# EAGLE board Swissler_HW2 (EAGLE 8.1.0)
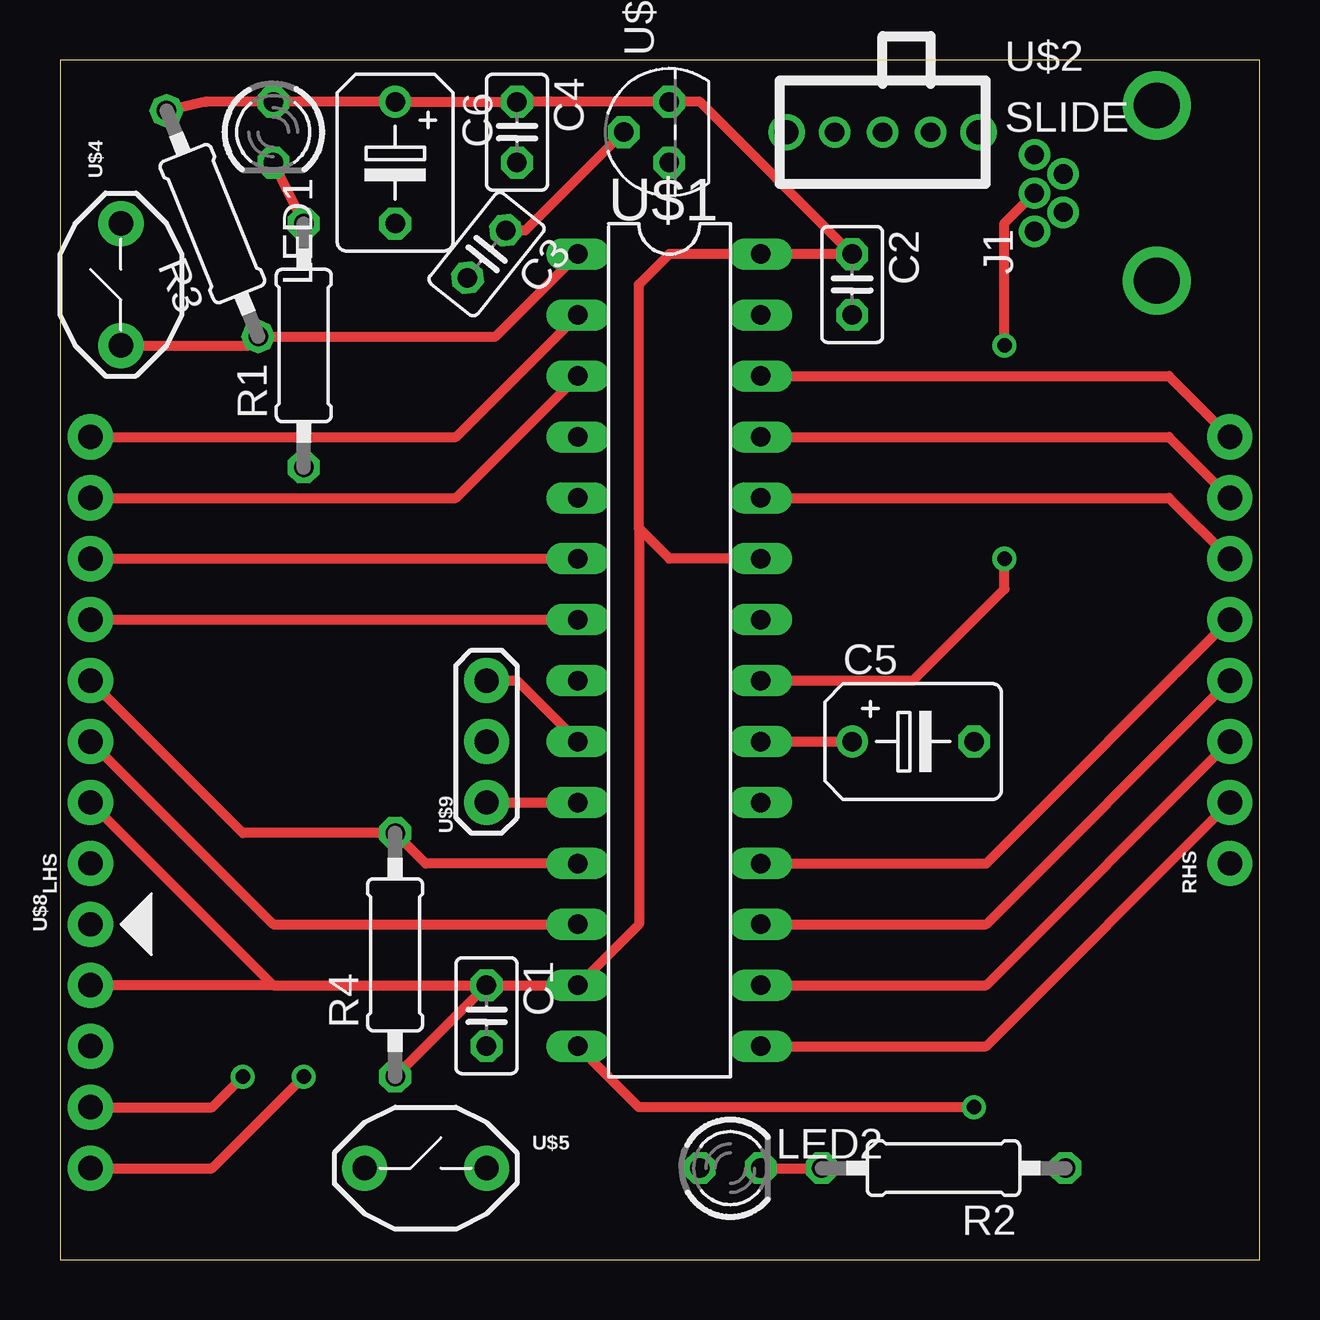
[diagram p0: board, top side]
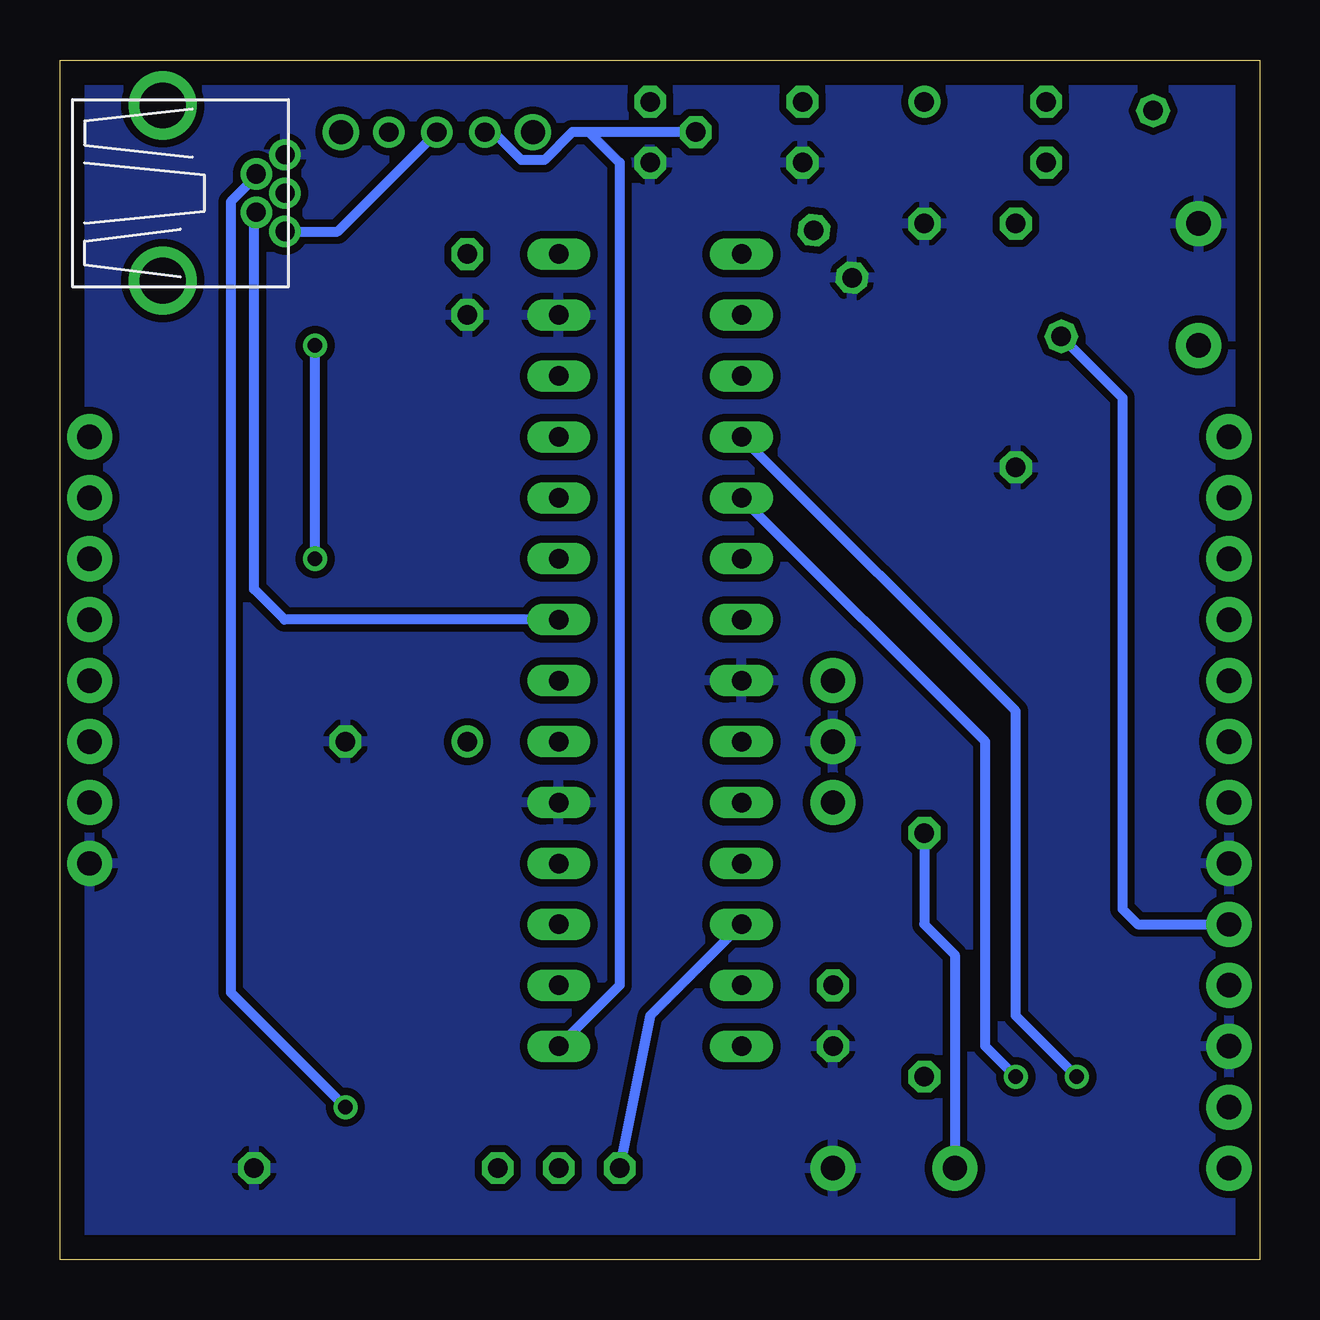
[diagram p1: board, bottom side, seen from below]

Size 50 x 50 mm. Coordinates in mm from the lower left corner, seen from the top.
Outline: 0,0 50,0 50,50 0,50 0,0
Copper layers (1*16): Top 0.035mm / dielectric 1.5mm / Bottom 0.035mm
Design rules "default": minimum track width 10mil, minimum drill 24mil, track to track 8mil, track to pad 8mil, pad to pad 8mil, via to via 8mil, smd to smd 8mil, copper to edge 40mil, drill to drill 8mil, minimum pad ring 10mil, minimum via ring 8mil, stop-mask expansion 4mil, vias tented up to drill 0mil, thermal gap 10mil

## Footprints (pad centres in the part's own frame; a part is rotated, then mirrored left to right if it is on the bottom)
C025-025X050 = drill 0.813 octagon: 1 -1.27,0; 2 1.27,0
B45181B = drill 0.813: + -2.54,0 | drill 0.813 octagon: - 2.54,0
USB-MB-H = drill 0.8: D+ 5.1,0; D- 3.9,0.8; GND 5.1,-1.6; ID 3.9,-0.8; VBUS 5.1,1.6 | drill 1.9: P$6 0,-3.65; P$7 0,3.65
LED3MM = drill 0.813 octagon: A -1.27,0; K 1.27,0
1X08 = drill 1.016 pad 1.88: 1 0,0; 2 2.54,0; 3 5.08,0; 4 7.62,0; 5 10.16,0; 6 12.7,0; 7 15.24,0; 8 17.78,0
0207/10 = drill 0.813 octagon: 1 -5.08,0; 2 5.08,0
DIL28-3 = drill 0.813 long: 1 -16.51,-3.81; 2 -13.97,-3.81; 3 -11.43,-3.81; 4 -8.89,-3.81; 5 -6.35,-3.81; 6 -3.81,-3.81; 7 -1.27,-3.81; 8 1.27,-3.81; 9 3.81,-3.81; 10 6.35,-3.81; 11 8.89,-3.81; 12 11.43,-3.81; 13 13.97,-3.81; 14 16.51,-3.81; 15 16.51,3.81; 16 13.97,3.81; 17 11.43,3.81; 18 8.89,3.81; 19 6.35,3.81; 20 3.81,3.81; 21 1.27,3.81; 22 -1.27,3.81; 23 -3.81,3.81; 24 -6.35,3.81; 25 -8.89,3.81; 26 -11.43,3.81; 27 -13.97,3.81; 28 -16.51,3.81
SLIDE = drill 0.8: 1 -2,0; 2 0,0; 3 2,0 | drill 1: P$1 -4,0; P$2 4,0
TO92 = drill 0.813 octagon: 1 -1.27,0; 2 0,1.905; 3 1.27,0
PB = drill 1.016 pad 1.88: 1 -2.54,0; 2 2.54,0
1X05 = drill 1.016 pad 1.88: 1 0,0; 2 2.54,0; 3 5.08,0; 4 7.62,0; 5 10.16,0
OSC = drill 1.016 pad 1.88: 1 -2.54,0; 2 0,0; 3 2.54,0

## Placement (x,y rotation side)
C1  0.1uF  [C025-025X050]  17.78,10.16 270 top
C2  0.1uF  [C025-025X050]  33.02,40.64 270 top
C3  0.1uF  [C025-025X050]  17.78,41.91 231.3 top
C4  0.1uF  [C025-025X050]  19.05,46.99 270 top
C5  10uF  [B45181B]  35.56,21.59 0 top
C6  10uF  [B45181B]  13.97,45.72 270 top
J1  USB-MB-H  [USB-MB-H]  45.72,44.45 180 top
LED1  RED  [LED3MM]  8.89,46.99 270 top
LED2  GREEN  [LED3MM]  27.94,3.81 0 top
LHS  CONN_08  [1X08]  1.27,16.51 90 top
R1  330  [0207/10]  10.16,38.1 90 top
R2  330  [0207/10]  36.83,3.81 180 top
R3  10k  [0207/10]  6.35,43.18 112.1 top
R4  10k  [0207/10]  13.97,12.7 90 top
RHS  CONN_08  [1X08]  48.77,16.51 90 top
U$1  PIC32MX250F128B  [DIL28-3]  25.4,25.4 270 top
U$2  SLIDE  [SLIDE]  34.29,46.99 0 top
U$3  MMCP1702  [TO92]  25.4,46.99 90 top
U$4  RESET  [PB]  2.54,40.64 90 top
U$5  USER  [PB]  15.24,3.81 0 top
U$8  PICKIT3  [1X05]  1.27,13.97 270 top
U$9  OSC  [OSC]  17.78,21.59 90 top

## Library data of the parts
C1-C6 J1 LHS R1-R4 RHS U$1-U$5 U$8 U$9 = Swissler_HW2
LED1 LED2 = led

## Nets
+3V3: C1.1 C2.1 C4.1 C6.+ LED1.A LHS.2 R3.2 R4.1 U$1.13 U$1.23 U$1.28 U$3.3 U$8.2
+5V: C3.1 RHS.2 U$1.15 U$2.1 U$3.2
A0: LHS.8 U$1.2
A1: LHS.7 U$1.3
A4/LED: LED2.A LHS.3 U$1.12
B2: LHS.6 U$1.6
B3: LHS.5 U$1.7
B4/USER: LHS.4 R4.2 U$1.11 U$5.1
B7: RHS.3 U$1.16
B8: RHS.4 U$1.17
B9: RHS.5 U$1.18
B13: RHS.6 U$1.24
B14: RHS.7 U$1.25
B15: RHS.8 U$1.26
D+: J1.D+ U$1.21
D-: J1.D- U$1.22
GND: C1.2 C2.2 C3.2 C4.2 C5.- C6.- J1.GND LHS.1 R1.1 R2.1 RHS.1 U$1.8 U$1.19 U$1.27 U$3.1 U$4.2 U$5.2 U$8.3 U$9.2
MCLR: R3.1 U$1.1 U$4.1 U$8.1
N$2: U$1.9 U$9.3
N$3: U$1.10 U$9.1
N$4: LED2.K R2.2
N$5: LED1.K R1.2
PGC: U$1.5 U$8.5
PGD: U$1.4 U$8.4
USBID: J1.ID U$1.14
VBUS: J1.VBUS U$2.2
VCAP: C5.+ U$1.20

## Tracks (layer width: path | path; a pad name or v marks a point on that pad's centre or on a via)
+3V3
  Top 0.406: R3.2 6.08,48.26 LED1.A C6.+ C4.1 U$3.3 26.67,48.26 C2.1 U$1.28 25.4,41.91 24.13,40.64 24.13,30.48 | C1.1 U$1.13 24.13,13.97 24.13,30.48 | R4.1 C1.1 | 8.89,11.43 U$8.2 | LHS.2 8.89,11.43 | U$1.23 25.4,29.21 24.13,30.48 | 8.89,11.43 C1.1
+5V
  Top 0.406: U$1.15 38.61,8.89 RHS.2 | C3.1 19.41,42.9 U$3.2
  Bottom 0.406: U$1.15 26.67,11.43 26.67,45.72 27.94,46.99 | U$3.2 27.94,46.99 | 27.94,46.99 28.65,46.99 29.81,45.83 30.77,45.83 31.93,46.99 U$2.1
A0
  Top 0.406: LHS.8 16.51,34.29 U$1.2
A1
  Top 0.406: LHS.7 16.51,31.75 U$1.3
A4/LED
  Top 0.406: LHS.3 8.89,13.97 U$1.12 21.59,13.6
  Bottom 0.406: U$1.12 25.4,10.16 LED2.A
B2
  Top 0.406: LHS.6 U$1.6
B3
  Top 0.406: LHS.5 U$1.7
B4/USER
  Top 0.406: U$1.11 15.24,16.51 R4.2 7.62,17.78 LHS.4
  Bottom 0.406: R4.2 13.97,13.97 12.7,12.7 U$5.1
B7
  Top 0.406: U$1.16 38.61,11.43 RHS.3
B8
  Top 0.406: U$1.17 38.61,13.97 RHS.4
B9
  Top 0.406: U$1.18 38.61,16.51 RHS.5
B13
  Top 0.406: U$1.24 46.23,31.75 RHS.6
B14
  Top 0.406: U$1.25 46.23,34.29 RHS.7
B15
  Top 0.406: U$1.26 46.23,36.83 RHS.8
D+  (via drill 0.6)
  Top 0.406: U$1.21 35.56,24.13 39.37,27.94 v39.37,29.21 | v39.37,38.1 39.37,43.2 J1.D+
  Bottom 0.406: v39.37,29.21 v39.37,38.1
D-
  Bottom 0.406: U$1.22 40.64,26.67 41.91,27.94 41.91,43.56 J1.D-
GND
  pour Bottom (isolate 0.305): 0,50.8 -2.54,50.8 -2.54,-2.54 50.8,-2.54 50.8,50.8
MCLR
  Top 0.406: U$4.1 7.89,38.1 R3.1 18.15,38.47 U$1.1
  Bottom 0.406: R3.1 5.71,35.93 5.71,14.61 5.08,13.97 U$8.1
N$2
  Top 0.406: U$9.3 19.05,24.13 U$1.9
N$3
  Top 0.406: U$9.1 U$1.10
N$4
  Top 0.406: LED2.K R2.2
N$5
  Top 0.406: LED1.K R1.2
PGC  (via drill 0.6)
  Top 0.406: U$8.5 6.35,3.81 v10.16,7.62
  Bottom 0.406: U$1.5 11.43,21.59 11.43,8.89 v10.16,7.62
PGD  (via drill 0.6)
  Top 0.406: U$8.4 6.35,6.35 v7.62,7.62
  Bottom 0.406: U$1.4 10.16,22.86 10.16,10.16 v7.62,7.62
USBID  (via drill 0.6)
  Top 0.406: v38.1,6.35 24.13,6.35 U$1.14
  Bottom 0.406: J1.ID 41.82,45.15 42.88,44.09 42.88,11.13 v38.1,6.35
VBUS
  Bottom 0.406: J1.VBUS 38.43,42.85 U$2.2
VCAP
  Top 0.406: U$1.20 C5.+